# Altium PCB updated.PcbDoc
Units mm, origin at the board's own origin, x right, y up, seen from the top; angles counter-clockwise.
Board outline 39.24 x 46.99 mm, 2 copper layers (Top Layer, Bottom Layer); 60 components, 42 nets, 183 pads, 13 vias.
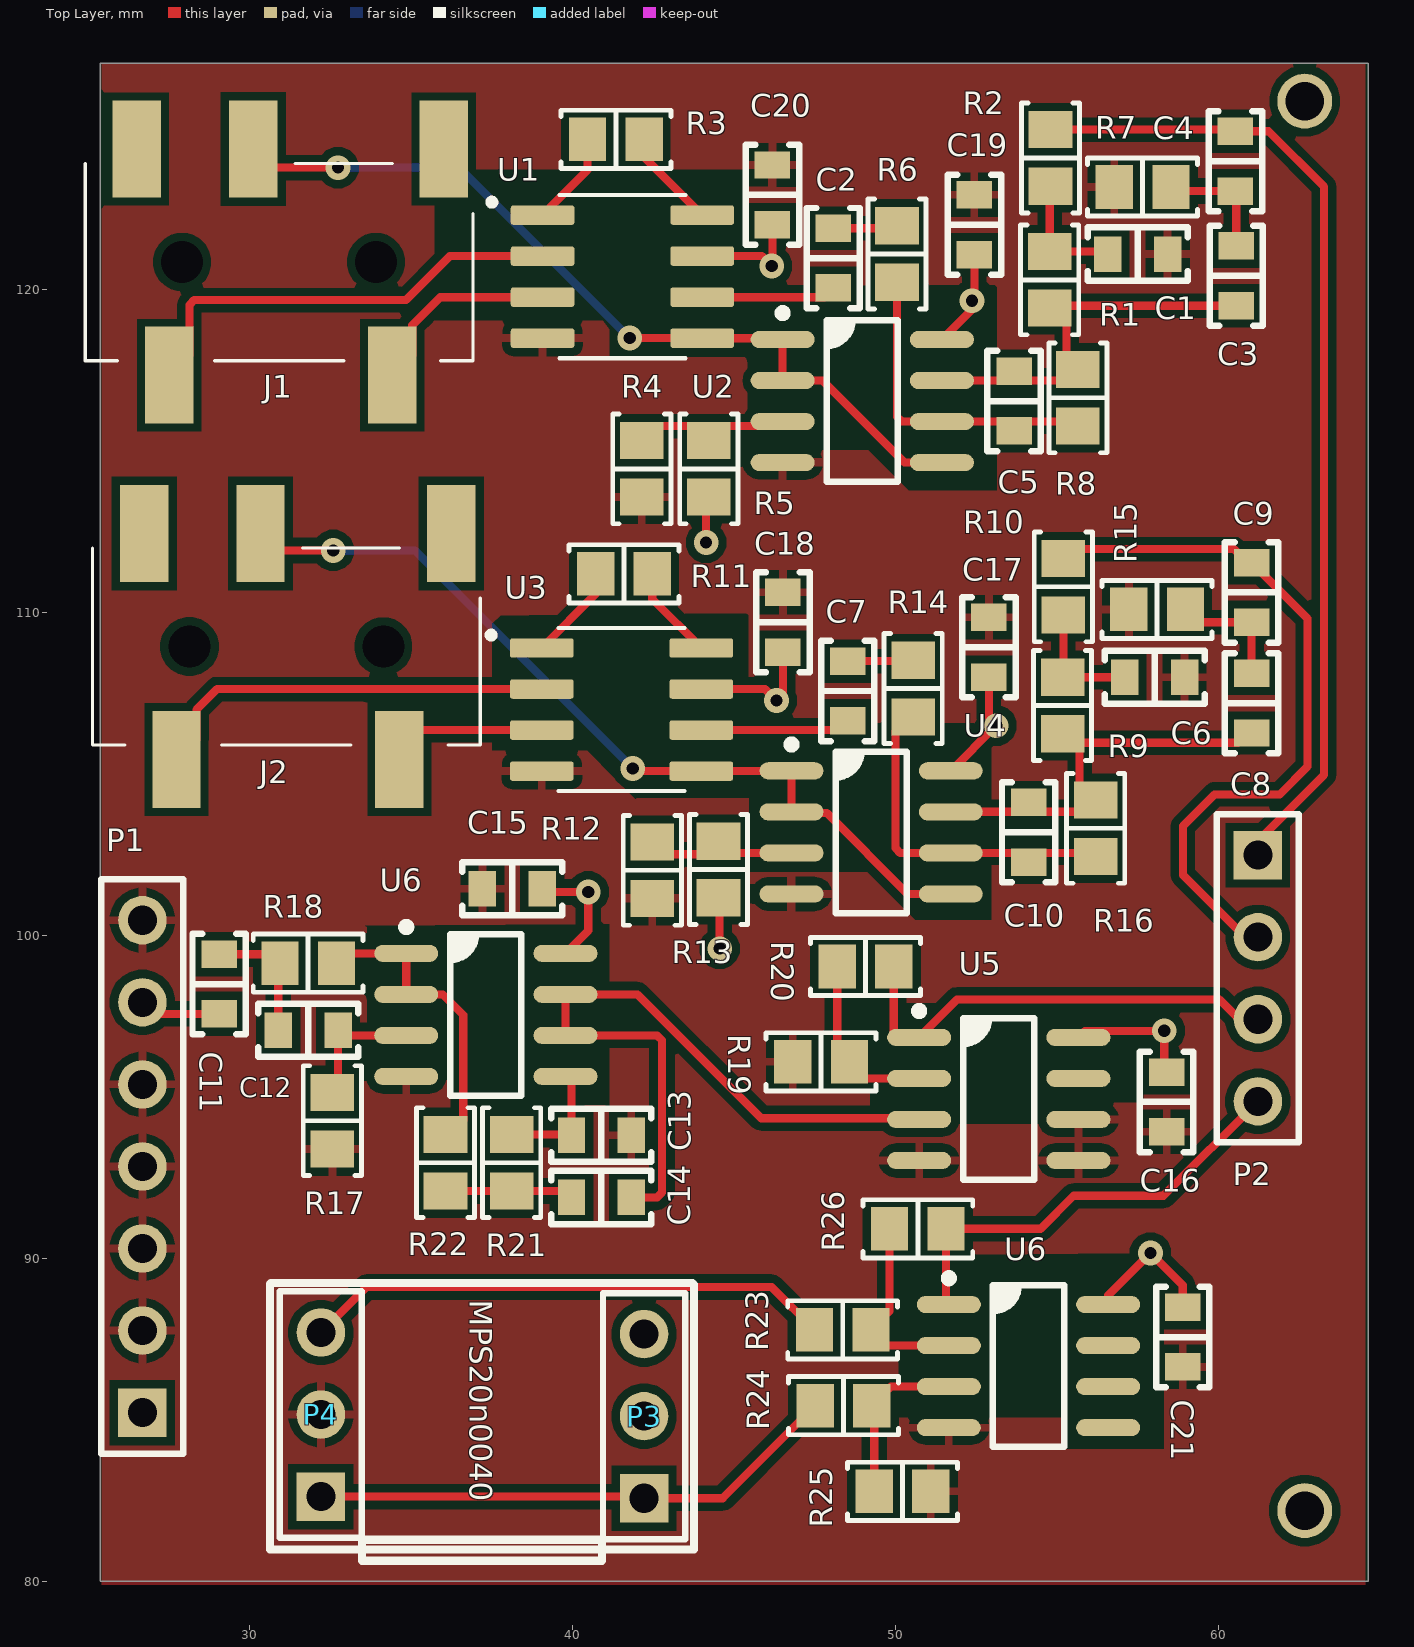
[diagram p0: Top Layer view]
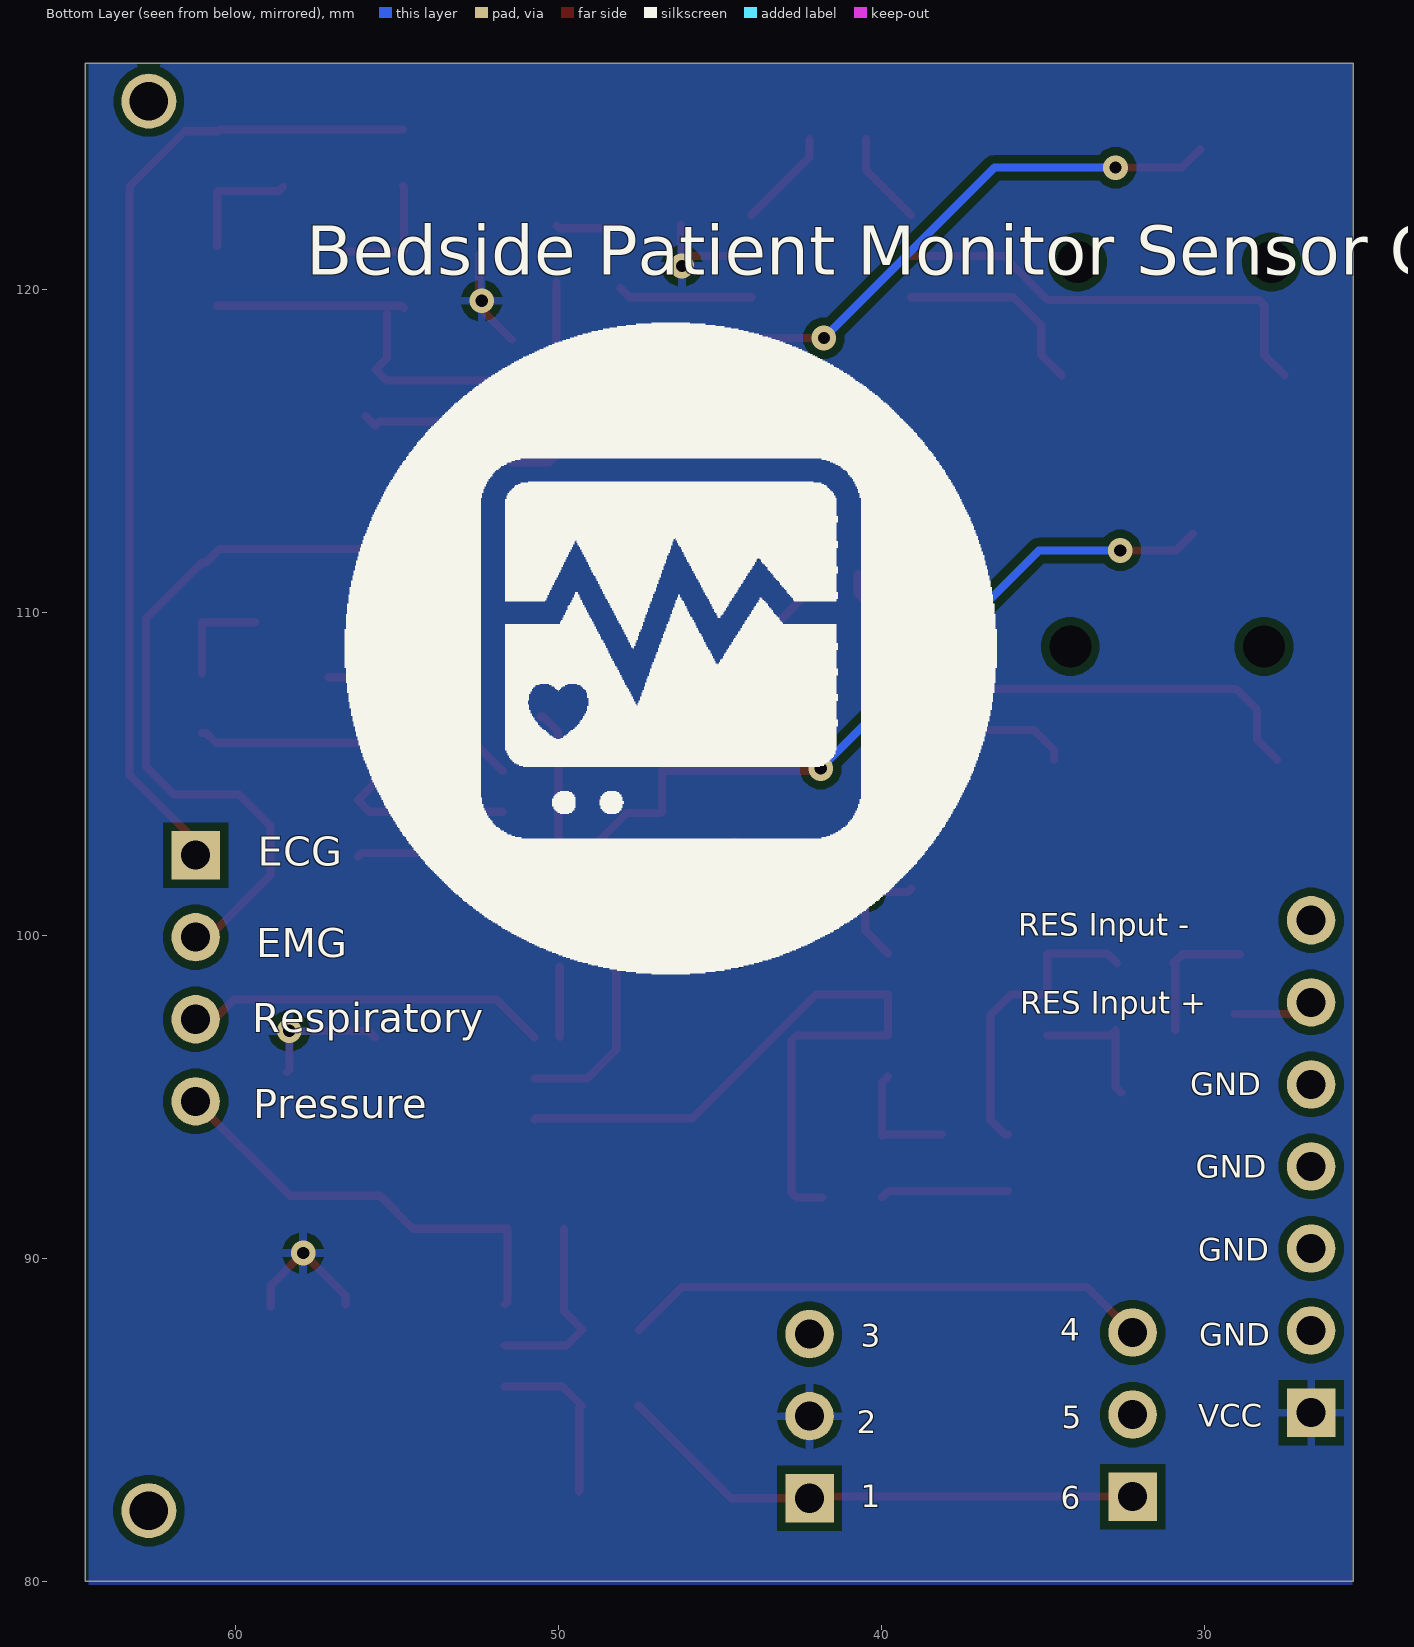
[diagram p1: Bottom Layer view, seen from below]
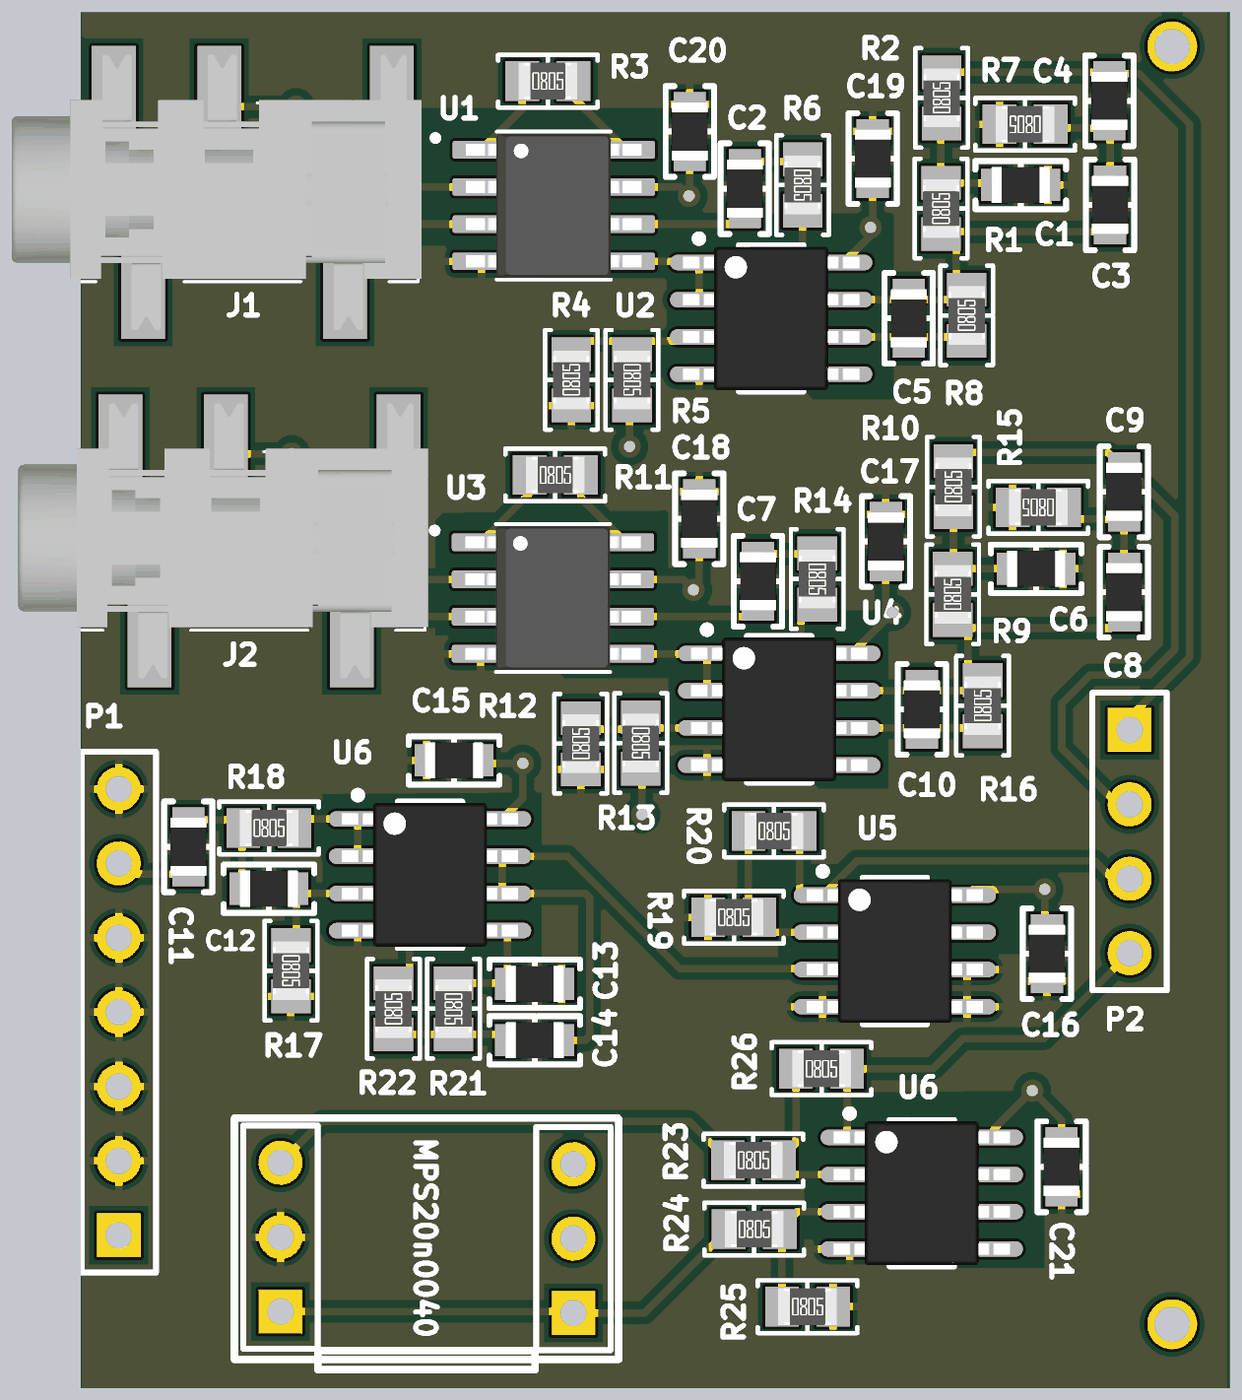
[diagram p2: 3D render of the assembled board from above, using the file's embedded part models]

## Layer stack, top to bottom
Top Solder: solder mask 0.0102, Solder Resist, Dk 3.5
Top Layer: signal copper 0.0356
Dielectric 1: dielectric 0.32, FR-4, Dk 4.8
Bottom Layer: signal copper 0.0356
Bottom Solder: solder mask 0.0102, Solder Resist, Dk 3.5

## Board outline
25.4,80.01 25.4,127 64.643,127 64.643,80.01

## Design rules (kind name [scope] priority, off if disabled: settings)
Clearance [All] p1: gap=0.254 ignorepadtopadclearanceinfootprint=FALSE except(0: Arc-Hole Track-Hole SMDPad-Hole THPad-Hole Via-Hole Fill-Hole Poly-Hole Region-Hole Text-Hole)
PolygonConnect [All] p1: connectstyle=Relief reliefconductorwidth=0.254 reliefentries=4 polygonreliefangle="90 Angle" airgapwidth=0.254
RoutingVias [All] p1: holewidth=0.711 width=1.27 viastyle="Through Hole" minholewidth=0.2 minwidth=0.5 maxholewidth=0.711 maxwidth=1.27
SilkToSolderMaskClearance [IsText] p1: minsilkscreentomaskgap=0.254 clearancetoexposedcopper=TRUE
SolderMaskExpansion [All] p1: expansion=0.102 istentingtop=FALSE
Width [All] p1: maxlimit=0.254 minlimit=0.254 preferedwidth=0.254
29 further rules are at their usual default settings.

## Components (designator, comment, footprint, x,y, rotation, side; value= is the part's Value field where it differs from the comment)
C1 "200nF" C0805 57.505,121.095 r0 top
C2 "10uF" C0805 48.08,120.97 r270 top
C3 "100nF" C0805 60.555,120.42 r270 top
C4 "100nF" C0805 60.53,123.97 r270 top
C5 "68nF" C0805 53.68,116.545 r270 top
C6 "200nF" C0805 58.03,107.995 r0 top
C7 "10uF" C0805 48.53,107.57 r270 top
C8 "100nF" C0805 61.03,107.195 r270 top
C9 "100nF" C0805 61.03,110.62 r270 top
C10 "100nF" C0805 54.13,103.195 r270 top
C11 "100uF" C0805 29.075,98.5 r270 top
C12 "100uF" C0805 31.83,97.07 r180 top
C13 "100uF" C0805 40.905,93.82 r0 top
C14 "220uF" C0805 40.905,91.895 r180 top
C15 "0.1uF" C0805 38.15,101.45 r0 top
C16 "0.1uF" C0805 58.4,94.85 r90 top
C17 "0.1uF" C0805 52.9,108.925 r270 top
C18 "0.1uF" C0805 46.525,109.7 r270 top
C19 "0.1uF" C0805 52.45,122 r270 top
C20 "0.1uF" C0805 46.2,122.925 r270 top
C21 "0.1uF" C0805 58.9,87.575 r90 top
J1 "PJ-327A_1" PJ327A 29.93,120.845 r0 top
J2 "PJ-327A_1" PJ327A 30.155,108.945 r0 top
P1 "Header 7" HDR1X7 26.7,85.235 r90 top
P2 "Header 4" HDR1X4 61.225,102.49 r270 top
P3 "Header 3" HDR1X3 42.225,82.585 r90 top
P4 "Header 3" HDR1X3 32.225,82.635 r90 top
R1 "33k" R0805 54.78,120.295 r90 top
R2 "33k" R0805 54.805,124.07 r90 top
R3 "2.2k" R0805 41.355,124.645 r0 top
R4 "6.8k" R0805 42.155,114.445 r90 top
R5 "6.8k" R0805 44.23,114.445 r270 top
R6 "4.7k" R0805 50.055,121.095 r270 top
R7 "15k" R0805 57.655,123.17 r180 top
R8 "100k" R0805 55.655,116.645 r90 top
R9 "33k" R0805 55.18,107.12 r90 top
R10 "33k" R0805 55.205,110.795 r90 top
R11 "2.2k" R0805 41.605,111.195 r0 top
R12 "6.8k" R0805 42.48,102.02 r90 top
R13 "6.8k" R0805 44.53,102.045 r270 top
R14 "4.7k" R0805 50.555,107.645 r270 top
R15 "15k" R0805 58.105,110.095 r180 top
R16 "33k" R0805 56.205,103.32 r90 top
R17 "27k" R0805 32.58,94.27 r270 top
R18 "12k" R0805 31.83,99.145 r0 top
R19 "1k" R0805 47.705,96.095 r0 top
R20 "100k" R0805 49.08,99.045 r0 top
R21 "1.2k" R0805 38.13,92.97 r270 top
R22 "1.2k" R0805 36.08,92.97 r90 top
R23 "10k" R0805 48.375,87.8 r0 top
R24 "10k" R0805 48.4,85.45 r0 top
R25 "560k" R0805 50.225,82.8 r0 top
R26 "56k" R0805 50.7,90.925 r0 top
U1 "AD623BRZ" SOIC127P599X175-8N 41.555,120.395 r0 top
U2 "LM358DRG3" SOIC-8 48.98,116.545 r0 top
U3 "AD623BRZ" SOIC127P599X175-8N 41.53,106.995 r0 top
U4 "LM358DRG3" SOIC-8 49.255,103.195 r0 top
U5 "LM358DRG3" SOIC-8 53.205,94.945 r0 top
U6 "LM358DRG3" SOIC-8 54.125,86.675 r0 top
U6 "LM358DRG3" SOIC-8 37.33,97.545 r0 top

## Footprints (in the part's own frame and the unit in brackets; to place one, negate y for a bottom-side part, rotate by r counter-clockwise, add the part's x,y. Pads: shape width x height; smd on the part's side, far side on the other; paste and mask are expansions set on the pad)
C0805 [mm]
  rect 0.85x1.1 smd: 1(-0.925,0) 2(0.925,0)
  silkscreen extent -1.55,-0.82 1.55,0.82, body extent -1,-0.62 1,0.62, height 1.2
HDR1X3 [mm] "Connector; Header; 3 Position"
  rect 1.5x1.5 hole 0.9: 1(0,0)
  round 1.5 hole 0.9: 2(2.54,0) 3(5.08,0)
  silkscreen extent -1.27,-1.27 6.35,1.27
HDR1X4 [mm] "Connector; Header; 4 Position"
  rect 1.5x1.5 hole 0.9: 1(0,0)
  round 1.5 hole 0.9: 2(2.54,0) 3(5.08,0) 4(7.62,0)
  silkscreen extent -1.27,-1.27 8.89,1.27
HDR1X7 [mm] "Connector; Header; 7 Position"
  rect 1.5x1.5 hole 0.9: 1(0,0)
  round 1.5 hole 0.9: 2(2.54,0) 3(5.08,0) 4(7.62,0) 5(10.16,0) 6(12.7,0) 7(15.24,0)
  silkscreen extent -1.27,-1.27 16.51,1.27
PJ327A [mm]
  rect 1.5x3 smd: 2(4.5,-3.5) 3(-2.4,-3.5) 4(-3.4,3.5) 5(0.2,3.5) 6(6.1,3.5)
  round 0.65 hole 1.3 unplated: MH1(-2,0) MH2(4,0)
  silkscreen extent -5,-3.05 7,3.05, body extent -6.89,-4.7 7.11,4.7, height 4.79
R0805 [mm]
  rect 1.15x1.35 smd: 1(-0.875,0) 2(0.875,0)
  silkscreen extent -1.7,-0.9 1.7,0.9, body extent -1,-0.62 1,0.63, height 0.6
SOIC127P599X175-8N [mm]
  rrect25% 1.97x0.6 smd: 1(-2.47,1.905) 2(-2.47,0.635) 3(-2.47,-0.635) 4(-2.47,-1.905) 5(2.47,-1.905) 6(2.47,-0.635) 7(2.47,0.635) 8(2.47,1.905)
  silkscreen extent -4.14,-2.52 1.95,2.52, body extent -3,-2.45 3,2.45, height 1.75
SOIC-8 [mm]
  oval 1.98x0.53 smd: 1(-2.465,1.905) 2(-2.465,0.635) 3(-2.465,-0.635) 4(-2.465,-1.905) 5(2.465,-1.905) 6(2.465,-0.635) 7(2.465,0.635) 8(2.465,1.905)
  silkscreen extent -2.59,-2.5 1.1,2.84, body extent -3.01,-2.45 3.01,2.45, height 1.5

## Part data
C1 C2 C3 C4 C5 C6 C7 C8 C9 C10 C11 C12 C13 C14 C15 C16 C17 C18 C19 C20 C21: library part C
J1 J2: Manufacturer_Name=XKB, Manufacturer_Part_Number=PJ-327A, Datasheet Link=https://datasheet.lcsc.com/szlcsc/1903151105_XKB-Enterprise-PJ-327A0-SMT_C381135.pdf, Height=4.75mm
P1: "Header, 7-Pin", LatestRevisionDate=17-Jul-2002, LatestRevisionNote="Re-released for DXP Platform.", Publisher="Altium Limited"
P2: "Header, 4-Pin", LatestRevisionDate=17-Jul-2002, LatestRevisionNote="Re-released for DXP Platform.", Publisher="Altium Limited"
P3 P4: "Header, 3-Pin", LatestRevisionDate=17-Jul-2002, LatestRevisionNote="Re-released for DXP Platform.", Publisher="Altium Limited"
R1 R2 R3 R4 R5 R6 R7 R8 R9 R10 R11 R12 R13 R14 R15 R16 R17 R18 R19 R20 R21 R22 R23 R24 R25 R26: library part R
U1 U3: "Instrumentation Amplifier 1 Circuit Rail-to-Rail 8-SOIC", Package="SOIC-8 Analog Devices", Availability=Good, Check_prices=https://www.snapeda.com/parts/AD623BRZ/Analog%20Devices%20Inc./view-part/9793/?ref=eda, MF="Analog Devices", MP=AD623BRZ, Price=None, Purchase-URL=https://pricing.snapeda.com/search/part/AD623BRZ/?ref=eda, SnapEDA_Link=https://www.snapeda.com/parts/AD623BRZ/Analog%20Devices%20Inc./view-part/9793/?ref=snap
U2 U4 U5 U6 U6: "Dual standard operational amplifier 8-SOIC 0 to 70", Package="SOIC-8 Texas Instruments", Availability=Good, Check_prices=https://www.snapeda.com/parts/LM358DRG3/Texas%20Instruments/view-part/793077/?ref=eda, MF="Texas Instruments", MP=LM358DRG3, Price=None, Purchase-URL=https://pricing.snapeda.com/search/part/LM358DRG3/?ref=eda, SnapEDA_Link=https://www.snapeda.com/parts/LM358DRG3/Texas%20Instruments/view-part/793077/?ref=snap

## Free pads (board coordinates)
  round 1.7 hole 1.2: 2(62.675,82.2) 2(62.675,125.825)

## Via types
v1: diameter 0.762, hole 0.381, Top Layer to Bottom Layer, tented both sides, 13 vias

## Nets (pads, with @x,y where several pads share a name; then routed paths per layer and width w, separated by ;. In a path a pad name is that pad's centre, name@x,y a point inside that pad or via, vN(x,y) a via of type N, cw(c..) or ccw(c..) an arc to the next point about the centre after c; other vN are vias at no path point)
ECG: C4.1 P2.1 R2.2 | length 30.9
  Top Layer w0.254: R2.2 60.48,124.945 C4.1 61.555,124.895 63.271,123.179 63.271,104.976 P2.1@60.805,102.51
EMG: C9.1 P2.2 R10.2 | length 22
  Top Layer w0.254: R10.2 55.498,111.963 60.487,111.963 60.905,111.545 C9.1 62.763,109.812 62.763,105.232 61.901,104.37 59.88,104.37 58.905,103.395 58.905,101.87 P2.2@60.805,99.97
GND: C1.2 C6.2 C13.2 C15.1 C16.1 C17.1 C18.1 C19.1 C20.1 C21.1 P1.2 P1.3 P1.4 P1.5 P1.7 P4.2 R4.1 R7.2 R12.1 R15.2 R17.2 R19.1 R25.2 U1.4 U2.4 U3.4 U4.4 U5.4 U5.5 U5.6 U6.4
NetC1_1: C1.1 R1.2 R2.1 | length 3.9
  Top Layer w0.254: R2.1 54.78,123.17 R1.2 56.505,121.17 C1.1
NetC2_1: C2.1 R6.1 | length 2
  Top Layer w0.254: C2.1 49.98,121.895 R6.1
NetC2_2: C2.2 U1.6 | length 4.2
  Top Layer w0.254: U1.6 47.795,119.76 C2.2
NetC3_1: C3.1 C4.2 R7.1 | length 3.8
  Top Layer w0.254: R7.1 58.655,123.045 C4.2 60.555,123.02 C3.1
NetC3_2: C3.2 C5.1 R1.1 R8.2 U2.7 | length 12
  Top Layer w0.254: U2.7 55.315,117.18 R8.2 55.305,117.87 R1.1@55.305,119.245 ; R1.1 54.855,119.495 C3.2
NetC5_2: C5.2 R6.2 R8.1 U2.6 | length 10.3
  Top Layer w0.254: R6.2 50.055,116.059 50.204,115.91 U2.6 53.68,115.91 55.54,115.91 R8.1@55.655,115.795 ; R8.1 R8.1@55.97,116.085
NetC6_1: C6.1 R9.2 R10.1 | length 3.9
  Top Layer w0.254: R10.1 55.205,108.02 R9.2 C6.1
NetC7_1: C7.1 R14.1 | length 2
  Top Layer w0.254: C7.1 50.53,108.495 R14.1
NetC7_2: C7.2 U3.6 | length 4.6
  Top Layer w0.254: U3.6 48.245,106.36 C7.2
NetC8_1: C8.1 C9.2 R15.1 | length 3.2
  Top Layer w0.254: R15.1@59.38,109.695 C9.2 C8.1
NetC8_2: C8.2 C10.1 R9.1 R16.2 U4.7 | length 12.6
  Top Layer w0.254: U4.7 55.84,103.83 R16.2 55.705,104.695 R9.1@55.705,105.895 ; R9.1 55.429,106.245 55.705,105.969 60.604,105.969 60.905,106.27 C8.2
NetC10_2: C10.2 R14.2 R16.1 U4.6 | length 10.7
  Top Layer w0.254: R14.2 50.455,106.77 50.007,106.322 50.007,106.175 50.005,106.173 50.005,102.709 50.154,102.56 U4.6 56.09,102.56 R16.1
NetC11_1: C11.1 C12.2 R18.1 | length 4.3
  Top Layer w0.254: C11.1@28.905,99.42 30.68,99.42 R18.1 30.905,99.095 C12.2
NetC12_1: C12.1 R17.1 U6.3@34.865,96.91 | length 4.2
  Top Layer w0.254: R17.1 32.755,95.32 C12.1 32.915,96.91 U6.3@34.865,96.91
NetC13_1: C13.1 R21.1 U6.5@39.795,95.64 | length 3.8
  Top Layer w0.254: R21.1 39.955,93.845 C13.1 39.98,95.455 U6.5@39.795,95.64
NetC14_1: C14.1 U5.3 U6.6@39.795,96.91 U6.7@39.795,98.18 | length 22.6
  Top Layer w0.254: C14.1 42.631,91.895 42.78,92.044 42.78,96.761 42.631,96.91 39.795,96.91 39.795,98.18 42.02,98.18 45.855,94.345 50.705,94.345 U5.3
NetC14_2: C14.2 R21.2 R22.1 | length 4
  Top Layer w0.254: R22.1 R21.2 39.78,92.095 C14.2
NetJ1_2: J1.2 U1.3 | length 6.2
  Top Layer w0.254: J1.2 35.053,117.968 35.053,118.893 35.92,119.76 U1.3
NetJ1_3: J1.3 U1.2 | length 14
  Top Layer w0.254: J1.3 28.153,117.968 28.153,119.521 28.302,119.67 34.855,119.67 36.215,121.03 U1.2
NetJ1_5: J1.5 U1.5 U2.1 U2.2 U2.5 | length 26.1
  Top Layer w0.254: J1.5 30.705,123.77 v1(32.755,123.77) ; v1(41.78,118.495) 44.02,118.495 U1.5 46.475,118.49 U2.1 U2.2 47.745,117.18 50.285,114.64 U2.5
  Bottom Layer w0.254: v1(32.755,123.77) 36.505,123.77 v1(41.78,118.495)
NetJ2_2: J2.2 U3.3 | length 5
  Top Layer w0.254: J2.2 34.655,105.737 35.278,106.36 U3.3
NetJ2_3: J2.3 U3.2 | length 12.8
  Top Layer w0.254: J2.3 28.378,106.068 28.378,106.993 29.015,107.63 U3.2
NetJ2_5: J2.5 U3.5 U4.1 U4.2 U4.5 | length 26.7
  Top Layer w0.254: J2.5 30.88,111.92 v1(32.605,111.92) ; v1(41.88,105.17) 41.96,105.09 U3.5 46.78,105.09 U4.1 U4.2 46.828,103.792 47.883,103.792 50.385,101.29 U4.5
  Bottom Layer w0.254: v1(32.605,111.92) 35.13,111.92 v1(41.88,105.17)
NetP3_1: P3.1 P4.1 R24.1 | length 16.6
  Top Layer w0.254: P4.1@32.275,82.585 P4.1 42.175,82.635 P3.1 44.66,82.585 R24.1
NetP4_3: P4.3 R23.1 | length 16.4
  Top Layer w0.254: P4.3 33.635,89.125 46.175,89.125 R23.1
NetR3_1: R3.1 U1.1 | length 2.9
  Top Layer w0.254: U1.1 40.48,123.695 R3.1
NetR3_2: R3.2 U1.8 | length 3.1
  Top Layer w0.254: R3.2 42.23,124.095 U1.8
NetR4_2: R4.2 R5.1 U2.3 | length 5
  Top Layer w0.254: R4.2@42.155,115.27 42.653,115.768 43.782,115.768 R5.1 44.678,115.768 44.925,115.768 44.927,115.77 46.375,115.77 U2.3
NetR11_1: R11.1 U3.1 | length 3
  Top Layer w0.254: U3.1 40.73,110.57 R11.1
NetR11_2: R11.2 U3.8 | length 2.9
  Top Layer w0.254: R11.2 42.48,110.42 U3.8
NetR12_2: R12.2 R13.1 U4.3 | length 4.8
  Top Layer w0.254: R12.2 42.855,102.52 44.13,102.52 R13.1 44.89,102.56 U4.3
NetR18_2: R18.2 R22.2 U6.1@34.865,99.45 U6.2@34.865,98.18 | length 9.6
  Top Layer w0.254: R18.2 33.01,99.45 34.865,99.45 34.865,98.18 35.995,98.18 36.63,97.545 36.63,94.442 36.628,94.44 36.628,94.293 36.18,93.845 R22.2
NetR19_2: R19.2 R20.1 U5.2 | length 5.5
  Top Layer w0.254: R20.1 48.205,96.47 R19.2 49.095,95.58 U5.2
NetR23_2: R23.2 R26.1 U6.2@51.66,87.31 | length 6
  Top Layer w0.254: R26.1 49.825,88.375 R23.2 49.74,87.31 U6.2@51.66,87.31
NetR24_2: R24.2 R25.1 U6.3@51.66,86.04 | length 5.3
  Top Layer w0.254: R25.1 49.35,85.375 R24.2 49.865,86.04 U6.3@51.66,86.04
Pressure: P2.4 R26.2 U6.1@51.66,88.58 | length 13.7
  Top Layer w0.254: U6.1@51.66,88.58 51.575,88.665 R26.2 54.5,90.925 55.525,91.95 58.305,91.95 P2.4
"Res Input+": C11.2 P1.6 | length 2.5
  Top Layer w0.254: P1.6 27.06,97.575 C11.2
RROUT: P2.3 R20.2 U5.1 | length 13
  Top Layer w0.254: U5.1@49.955,96.87 R20.2 ; U5.1 51.91,98.02 60.033,98.02 60.623,97.43 P2.3@60.805,97.43
VCC: C15.2 C16.2 C17.2 C18.2 C19.2 C20.2 C21.2 P1.1 P3.2 R5.2 R13.2 U1.7 U2.8 U3.7 U4.8 U5.8 U6.8 | length 29.2
  Top Layer w0.254: C15.2 39.175,101.35 v1(40.5,101.35) 40.5,100.155 U6.8@39.795,99.45 ; U3.7 45.97,107.63 v1(46.325,107.275) 46.525,107.475 C18.2 ; U1.7 45.87,121.03 v1(46.175,120.725) 46.2,120.75 C20.2 ; v1(44.145,112.166) 44.145,113.485 R5.2 ; R13.2 44.564,101.136 v1(44.564,99.597) ; U2.8 52.375,119.38 v1(52.375,119.65) 52.45,119.725 C19.2 ; U4.8 51.725,105.1 v1(53.125,106.5) 52.9,106.725 C17.2 ; U5.8 55.87,97.05 v1(58.325,97.05) 58.325,95.85 C16.2 ; U6.8@56.575,88.595 56.59,88.58 56.59,88.865 v1(57.9,90.175) 58.9,89.175 C21.2
pads on no net: J1.4 J1.6 J1.MH1 J1.MH2 J2.4 J2.6 J2.MH1 J2.MH2 P3.3 U5.7 U6.5@56.59,84.77 U6.6@56.59,86.04 U6.7@56.59,87.31

## Polygon pours and split planes (outlines as drawn)
GND on Top Layer "GND_L01_P001" (solid, pour order 1): 25.436,127 64.552,127 64.552,79.907 25.436,79.907
VCC on Bottom Layer "VCC_L02_P000" (solid, pour order 0): 25.425,127 64.541,127 64.541,79.908 25.425,79.908

## Other copper
Top Layer:
  pour cut-out: 49.225,97.942 49.225,94.59 49.2,94.564 49.581,94.183 54.441,94.183 54.441,94.335 54.945,94.839 57.683,94.839 57.683,97.819
  pour cut-out: 35.738,119.024 35.738,123.901 35.916,123.723 45.396,123.723 45.396,117.85 45.339,117.907 41.148,117.907 41.148,118.761 40.945,119.024
  pour cut-out: 45.187,120.117 45.416,119.887 45.416,115.014 49.171,115.014 50.419,113.767 53.162,113.767 53.162,120.066 53.086,120.142
  pour cut-out: 37.77,109.906 37.516,109.652 37.516,105.715 40.462,105.715 41.961,104.216 42,104.255 45.459,104.255 45.459,109.913 45.39,109.982
  pour cut-out: 45.517,106.604 45.459,106.546 45.459,101.964 49.141,101.964 50.622,100.482 52.984,100.482 52.984,106.35 52.756,106.578
  pour cut-out: 33.604,100.305 33.655,100.254 33.655,96.469 36.779,96.469 36.728,96.418 36.728,94.767 41.008,94.767 41.148,94.627 41.148,100.355
  pour cut-out: 50.013,90.094 50.114,89.992 50.114,85.09 55.118,85.09 55.143,85.115 55.143,84.125 58.318,84.125 58.318,90.179

## Silkscreen, mask and mechanical layers (free items; w line width, h text height)
Top Overlay:
  lines w0.254: 30.65,89.225 30.65,81 43.775,81 43.775,89.2 ; 30.675,89.25 43.725,89.25 ; 33.5,80.65 40.925,80.65 40.925,81.3 33.5,81.3 33.5,80.65
  text "MPS20n0040" at 36.83,88.722 h0.7 r270
Bottom Overlay:
  drawing of 5 lines, arcs and shapes, not listed
  text "Bedside Patient Monitor Sensor Card" at 57.8,120.45 h1.52
  text "ECG" at 59.296,102.154 h0.9
  text "RES Input -" at 35.771,99.987 h0.7
  text "EMG" at 59.346,99.329 h0.9
  text "RES Input +" at 35.696,97.587 h0.7
  text "Respiratory" at 59.471,97.004 h0.9
  text "GND" at 30.446,95.054 h0.7
  text "Pressure" at 59.446,94.354 h0.9
  text "GND" at 30.271,92.504 h0.7
  text "GND" at 30.196,89.929 h0.7
  text "4" at 34.471,87.454 h0.7
  text "GND" at 30.171,87.304 h0.7
  text "3" at 40.646,87.279 h0.7
  text "VCC" at 30.196,84.804 h0.7
  text "5" at 34.421,84.754 h0.7
  text "2" at 40.771,84.604 h0.7
  text "1" at 40.646,82.304 h0.7
  text "6" at 34.446,82.254 h0.7
Mechanical 1:
  the board outline again, w0.254